# Altium PCB PCB_zesilovac.PcbDoc
Units mm, origin at the board's own origin, x right, y up, seen from the top; angles counter-clockwise.
Board outline 50 x 60 mm, 2 copper layers (Top Layer, Bottom Layer); 18 components, 15 nets, 49 pads, 2 vias.
Unrouted connection lines stored in the file: 7.
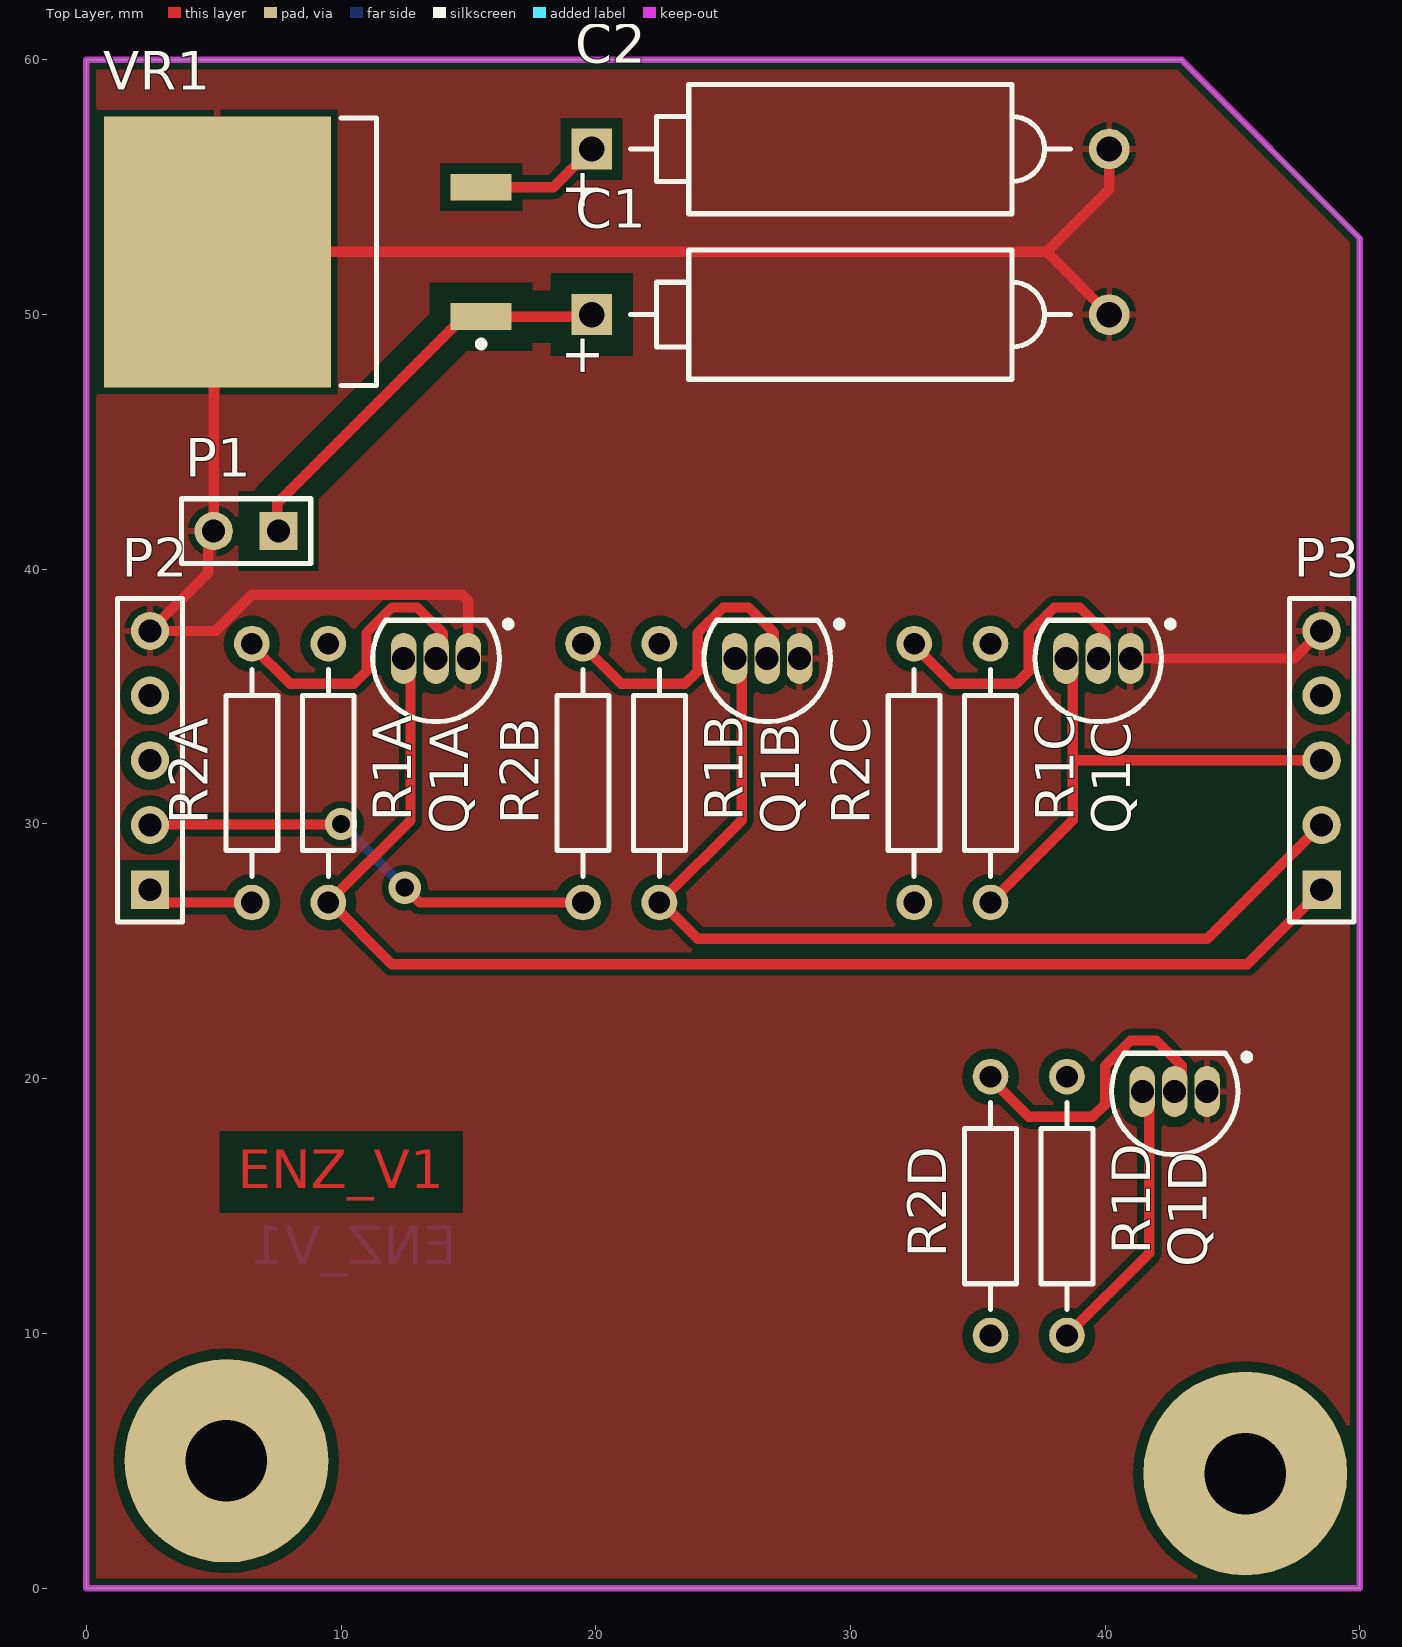
[diagram p0: Top Layer view]
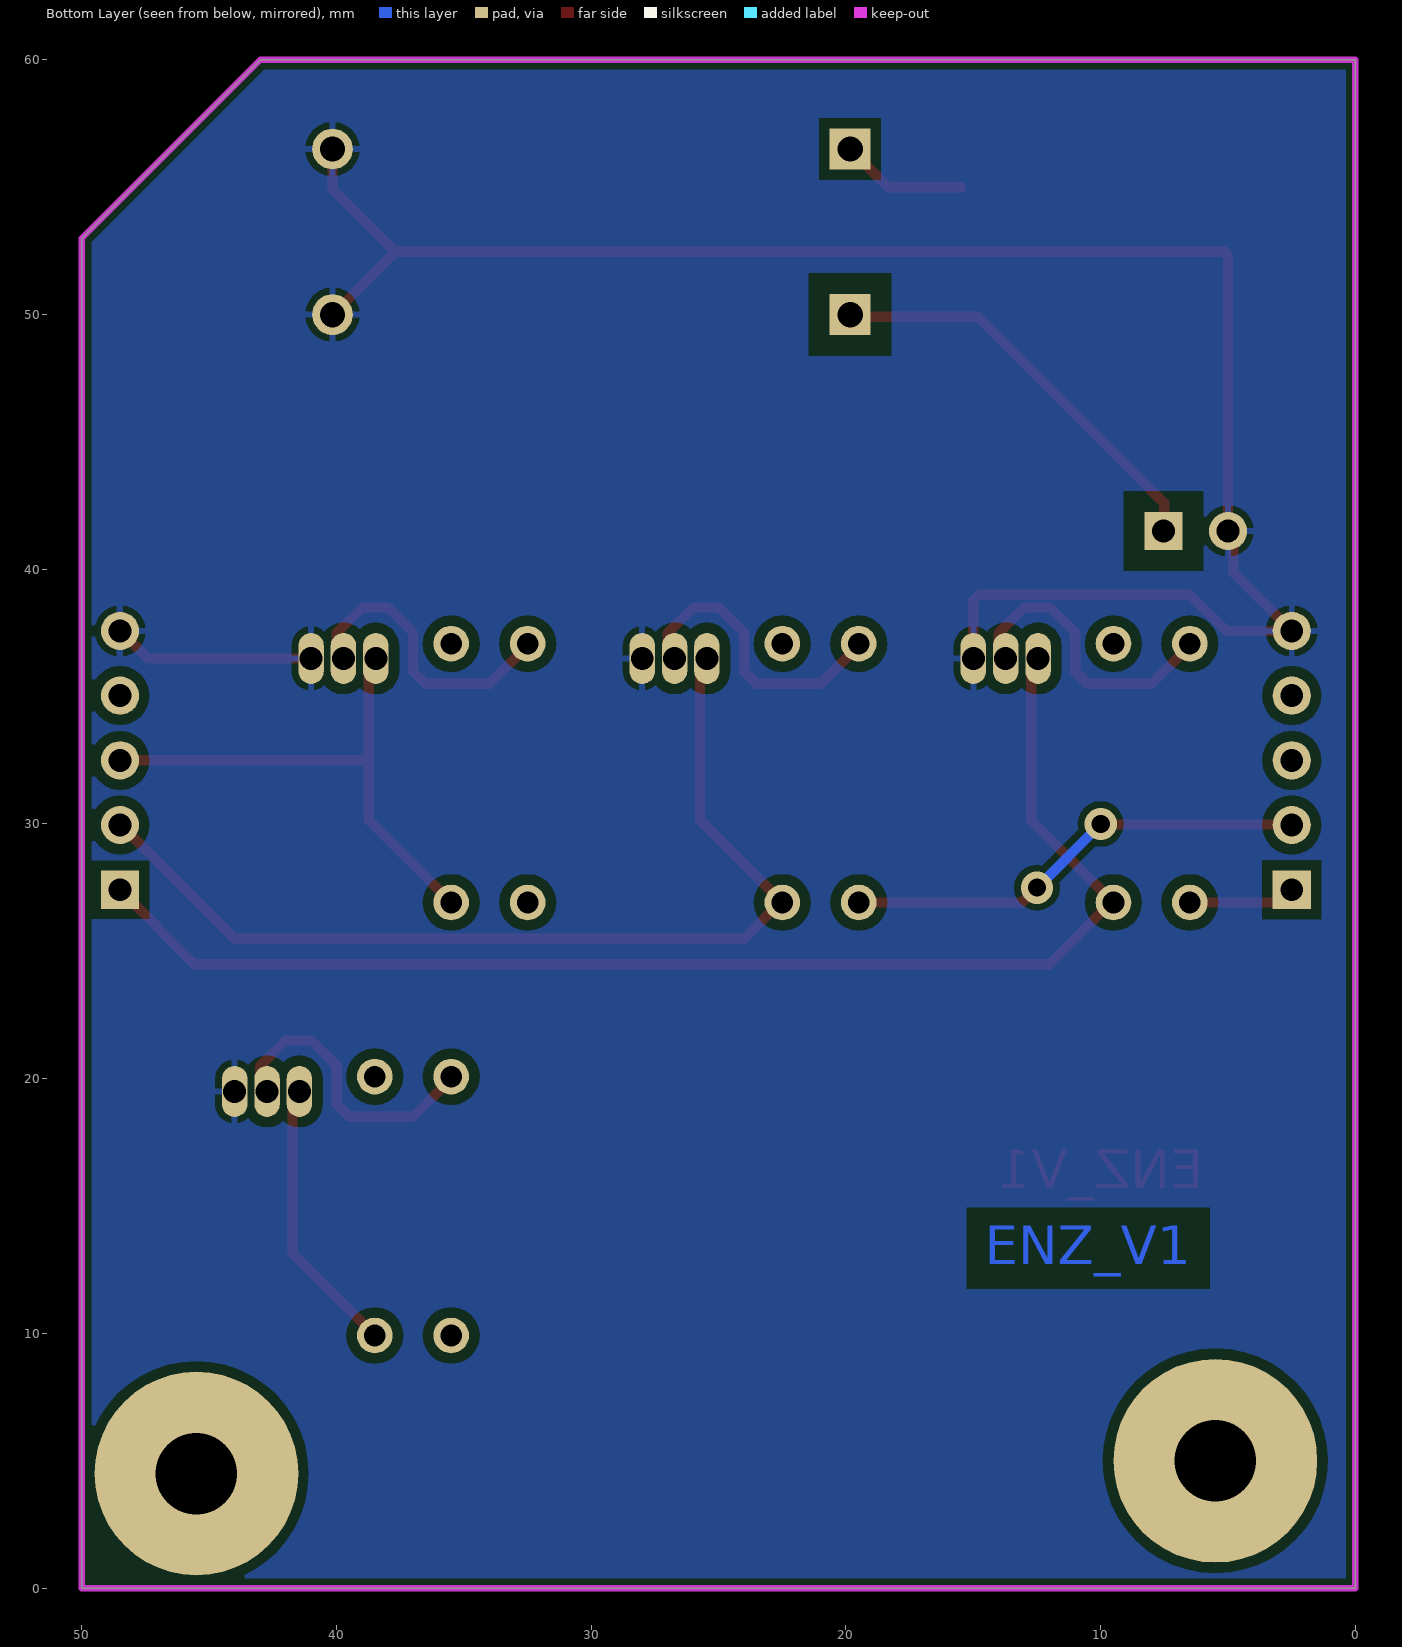
[diagram p1: Bottom Layer view, seen from below]

## Layer stack, top to bottom
Top Solder: solder mask 0.0102, Solder Resist, Dk 3.5
Top Layer: signal copper 0.0356
Dielectric 1: dielectric 0.32, FR-4, Dk 4.8
Bottom Layer: signal copper 0.0356
Bottom Solder: solder mask 0.0102, Solder Resist, Dk 3.5

## Board outline
0,0 0,60 43,60 50,53 50,0

## Design rules (kind name [scope] priority, off if disabled: settings)
Clearance Clearance_HW [InNetClass('*HV')] p1: gap=0.813 ignorepadtopadclearanceinfootprint=FALSE except(0: Arc-Hole Track-Hole SMDPad-Hole THPad-Hole Via-Hole Fill-Hole Poly-Hole Region-Hole Text-Hole)
Clearance [All] p2: gap=0.254 ignorepadtopadclearanceinfootprint=FALSE except(0: Arc-Hole Track-Hole SMDPad-Hole THPad-Hole Via-Hole Fill-Hole Poly-Hole Region-Hole Text-Hole; 0.406: Track-Track Track-SMDPad SMDPad-Poly THPad-Poly)
PolygonConnect [All] p1: connectstyle=Relief reliefconductorwidth=0.254 reliefentries=4 polygonreliefangle="90 Angle" airgapwidth=0.254
RoomDefinition U_kanal_4 [InComponentClass('U_kanal_4')] p1: confinementstyle=ConfineIn formatcopy=TRUE lockcomponents=FALSE outline 33.5,9 46,9 46,22 33.5,22
RoomDefinition U_kanal_3 [InComponentClass('U_kanal_3')] p2: confinementstyle=ConfineIn formatcopy=TRUE lockcomponents=FALSE outline 30.5,26 43,26 43,39 30.5,39
RoomDefinition U_kanal_2 [InComponentClass('U_kanal_2')] p3: confinementstyle=ConfineIn formatcopy=TRUE lockcomponents=FALSE outline 17.5,26 30,26 30,39 17.5,39
RoomDefinition U_kanal_1 [InComponentClass('U_kanal_1')] p4: confinementstyle=ConfineIn formatcopy=TRUE lockcomponents=FALSE outline 4.5,26 17,26 17,39 4.5,39
RoutingVias [All] p1: holewidth=0.711 width=1.27 viastyle="Through Hole" minholewidth=0.711 minwidth=1.27 maxholewidth=0.711 maxwidth=1.27
SolderMaskExpansion [All] p1: expansion=0.102 istentingtop=FALSE
Width [All] p1: maxlimit=0.813 minlimit=0.254 preferedwidth=0.406
30 further rules are at their usual default settings.

## Classes and differential pairs
net class *HV: VCC
channel class kanal: U_kanal_1 U_kanal_2 U_kanal_3 U_kanal_4
component class U_napajeni: C1 C2 VR1
component class U_kanal_4: Q1D R1D R2D
component class U_kanal_3: Q1C R1C R2C
component class U_kanal_2: Q1B R1B R2B
component class U_kanal_1: Q1A R1A R2A
component class main: P1 P2 P3

## Components (designator, comment, footprint, x,y, rotation, side; value= is the part's Value field where it differs from the comment)
C1 "Cap Pol2" POLAR0.8 30,50 r180 top value=100uF
C2 "Cap Pol2" POLAR0.8 30,56.5 r180 top value=100uF
P1 "Header 2" HDR1X2 7.54,41.5 r180 top
P2 "Header 5" HDR1X5 2.5,27.42 r90 top
P3 "Header 5" HDR1X5 48.5,27.42 r90 top
Q1A "2N3904" TO-92A 13.73,36.5 r90 top (schematic designator Q1)
Q1B "2N3904" TO-92A 26.73,36.5 r90 top (schematic designator Q1)
Q1C "2N3904" TO-92A 39.73,36.5 r90 top (schematic designator Q1)
Q1D "2N3904" TO-92A 42.73,19.5 r90 top (schematic designator Q1)
R1A "Res2" AXIAL-0.4 9.5,32 r90 top value=1K (schematic designator R1)
R1B "Res2" AXIAL-0.4 22.5,32 r90 top value=1K (schematic designator R1)
R1C "Res2" AXIAL-0.4 35.5,32 r90 top value=1K (schematic designator R1)
R1D "Res2" AXIAL-0.4 38.5,15 r90 top value=1K (schematic designator R1)
R2A "Res2" AXIAL-0.4 6.5,32 r90 top value=1K (schematic designator R2)
R2B "Res2" AXIAL-0.4 19.5,32 r90 top value=1K (schematic designator R2)
R2C "Res2" AXIAL-0.4 32.5,32 r90 top value=1K (schematic designator R2)
R2D "Res2" AXIAL-0.4 35.5,15 r90 top value=1K (schematic designator R2)
VR1 "Volt Reg" D2PAK_N 8.7,52.46 r180 top

## Footprints (in the part's own frame and the unit in brackets; to place one, negate y for a bottom-side part, rotate by r counter-clockwise, add the part's x,y. Pads: shape width x height; smd on the part's side, far side on the other; paste and mask are expansions set on the pad)
AXIAL-0.4 [mm] "Axial Device, Thru-Hole; 2 Leads; 0.4 in Pin Spacing"
  round 1.4 hole 0.85: 1(-5.08,0) 2(5.08,0)
  silkscreen extent -4.06,-1.02 4.06,1.02
D2PAK_N [mm] "D2-PAK, 4-Leads, Body 8.8x10.4mm, Pitch 2.54mm, Lead Span 15.1mm, IPC Medium Density"
  rect 2.4x1.05 smd: 1(-6.8,2.54) 3(-6.8,-2.54)
  rect 8.9x10.65 smd: 2(3.55,0)
  silkscreen extent -6.93,-5.25 -1.3,5.25, body extent -2.7,-5.28 6.3,5.28, height 4.69
HDR1X2 [mm] "Connector; Header; 2 Position"
  rect 1.5x1.5 hole 0.9: 1(0,0)
  round 1.5 hole 0.9: 2(2.54,0)
  silkscreen extent -1.27,-1.27 3.81,1.27
HDR1X5 [mm] "Connector; Header; 5 Position"
  rect 1.5x1.5 hole 0.9: 1(0,0)
  round 1.5 hole 0.9: 2(2.54,0) 3(5.08,0) 4(7.62,0) 5(10.16,0)
  silkscreen extent -1.27,-1.27 11.43,1.27
POLAR0.8 [mm] "Polarized Capacitor; 2 Leads"
  rect 1.6x1.6 hole 1: 1(10.16,0)
  round 1.6 hole 1: 2(-10.16,0)
  silkscreen extent -8.64,-2.54 8.64,2.54
TO-92A [mm] "TO, Flat Index; 3 In-Line, Axial Leads; Body Dia. 4.5mm; Leads 0.51 x 0.48 mm (max)"
  oval 2x1 hole 0.9: 1(0,-1.27) 2(0,0) 3(0,1.27)
  silkscreen extent -2.48,-2.96 1.5,2.48, body extent -2.48,-2.5 1.5,2.5, height 6.86

## Part data
C1 C2: "Polarized Capacitor (Axial)", LatestRevisionDate=17-Jul-2002, LatestRevisionNote="Re-released for DXP Platform.", PackageDescription="Polarized Capacitor; 2 Leads", PackageReference=POLAR0.8, Published=8-Jun-2000, Publisher="Altium Limited"
P1: "Header, 2-Pin", LatestRevisionDate=17-Jul-2002, LatestRevisionNote="Re-released for DXP Platform.", Publisher="Altium Limited"
P2 P3: "Header, 5-Pin", LatestRevisionDate=17-Jul-2002, LatestRevisionNote="Re-released for DXP Platform.", Publisher="Altium Limited"
Q1A Q1B Q1C Q1D: "NPN General Purpose Amplifier", ComponentLink1Description="Manufacturer Link", ComponentLink1URL=http://www.fairchildsemi.com/, ComponentLink2Description=Datasheet, ComponentLink2URL=http://www.fairchildsemi.com/ds/2N%2F2N3904.pdf, DatasheetVersion=1997, LatestRevisionDate=15-Jan-2003, LatestRevisionNote="PCB Footprint 'BCY-W3/D4.7' replaced", PackageDescription="TO, Flat Index; 3 In-Line, Axial Leads; Body Dia. 4.5mm; Leads 0.51 x 0.48 mm (max)", PackageReference=TO-92A, PackageVersion=Sep-1998, Published=8-Jun-2000, Publisher="Altium Limited"
R1A R1B R1C R1D R2A R2B R2C R2D: "Resistor", LatestRevisionDate=17-Jul-2002, LatestRevisionNote="Re-released for DXP Platform.", PackageDescription="Axial Device, Thru-Hole; 2 Leads; 0.4 in Pin Spacing", PackageReference=AXIAL-0.4, Published=8-Jun-2000, Publisher="Altium Limited"
VR1: "Voltage Regulator", LatestRevisionDate=29-May-2009, LatestRevisionNote="IPC-7351 Footprint Added.", PackageDescription="3-Pin Transistor Outline Package 2.54 mm Pitch, 15.1 mm Lead Span", PackageReference=D2PAK, Published=24-Mar-1999, Publisher="Altium Limited"

## Free pads (board coordinates)
  round 8 hole 3.2: 1(5.5,5) 3(45.5,4.5)

## Via types
v1: diameter 1.27, hole 0.711, Top Layer to Bottom Layer, 2 vias

## Nets (pads, with @x,y where several pads share a name; then routed paths per layer and width w, separated by ;. In a path a pad name is that pad's centre, name@x,y a point inside that pad or via, vN(x,y) a via of type N, cw(c..) or ccw(c..) an arc to the next point about the centre after c; other vN are vias at no path point)
12V: C2.1 R1A.2 R1B.2 R1C.2 R1D.2 VR1.3 | length 5
  Top Layer w0.406: VR1.3 18.34,55 C2.1
GND: C1.2 C2.2 P1.2 P2.5 P3.5 Q1A.1 Q1B.1 Q1C.1 Q1D.1 VR1.2 | length 80.5
  Top Layer w0.406: Q1A.1 15,38.762 14.762,39 6.5,39 5.08,37.58 P2.5 4.791,39.871 4.791,41.291 P1.2 5,52.31 VR1.2 37.7,52.46 ; C1.2 37.7,52.46 ; C2.2 40.16,54.92 37.7,52.46 ; Q1C.1 47.42,36.5 P3.5
IN_1: P2.1 R2A.1 | length 4.2
  Top Layer w0.406: P2.1 3,26.92 R2A.1
IN_2: P2.2 R2B.1 | length 18.3
  Top Layer w0.406: P2.2 2.52,29.98 9.98,29.98 v1(10,30) ; v1(12.5,27.5) 13.08,26.92 R2B.1
  Bottom Layer w0.406: v1(10,30) v1(12.5,27.5)
IN_3: P2.3 R2C.1
IN_4: P2.4 R2D.1
NetP3_1: P3.1 Q1A.3 R1A.1 | length 52.6
  Top Layer w0.406: Q1A.3@12.73,37 12.73,30.15 R1A.1 9.58,26.92 12,24.5 45.58,24.5 P3.1
NetP3_2: P3.2 Q1B.3 R1B.1 | length 39.9
  Top Layer w0.406: Q1B.3@25.73,37 25.73,30.15 R1B.1 22.58,26.92 24,25.5 44,25.5 48.46,29.96 P3.2
NetP3_3: P3.3 Q1C.3 R1C.1 | length 20.9
  Top Layer w0.406: R1C.1 38.73,30.15 Q1C.3@38.73,37 ; 39,32.5 P3.3
NetP3_4: P3.4 Q1D.3 R1D.1 | length 11.4
  Top Layer w0.406: R1D.1 41.73,13.15 Q1D.3@41.73,20
NetQ1A_2: Q1A.2 R2A.2 | length 11.2
  Top Layer w0.406: R2A.2 6.5,37 8,35.5 10.5,35.5 11,36 11,37.5 12,38.5 13,38.5 14,37.5 Q1A.2@14,37
NetQ1B_2: Q1B.2 R2B.2 | length 11.2
  Top Layer w0.406: R2B.2 19.5,37 21,35.5 23.5,35.5 24,36 24,37.5 25,38.5 26,38.5 27,37.5 Q1B.2@27,37
NetQ1C_2: Q1C.2 R2C.2 | length 11.2
  Top Layer w0.406: R2C.2 32.5,37 34,35.5 36.5,35.5 37,36 37,37.5 38,38.5 39,38.5 40,37.5 Q1C.2@40,37
NetQ1D_2: Q1D.2 R2D.2 | length 11.2
  Top Layer w0.406: R2D.2 35.5,20 37,18.5 39.5,18.5 40,19 40,20.5 41,21.5 42,21.5 43,20.5 Q1D.2@43,20
VCC: C1.1 P1.1 VR1.1 | length 16.5
  Top Layer w0.406: P1.1 7.5,41.54 7.5,42.595 14.825,49.92 VR1.1 19.76,49.92 C1.1

## Polygon pours and split planes (outlines as drawn)
GND on Top Layer "top" (solid, remove dead copper, pour order 0): 0,0 0,60 43,60 50,53 50,0
GND on Bottom Layer "bottom" (solid, remove dead copper, pour order 1): 0,0 0,60 43,60 50,53 50,0

## Keep-outs
Keep-Out Layer:
  the board outline again, w0.254

## Other copper
Top Layer:
  text "ENZ_V1" at 5.954,15.708 h1.52
Bottom Layer:
  text "ENZ_V1" at 14.546,12.708 h1.52

## Text inside footprints (layer, text, board x,y; h text height)
C1: Top Overlay "+" at 20.348,49.05 h1.5 r180
C2: Top Overlay "+" at 20.348,55.55 h1.5 r180